# Altium PCB 222.PcbDoc
Units mil, origin at the board's own origin, x right, y up, seen from the top; angles counter-clockwise.
Board outline 1929.13 x 275.59 mil, 2 copper layers (Top Layer, Bottom Layer); 5 components, 5 nets, 22 pads, 0 vias.
Unrouted connection lines stored in the file: 17.
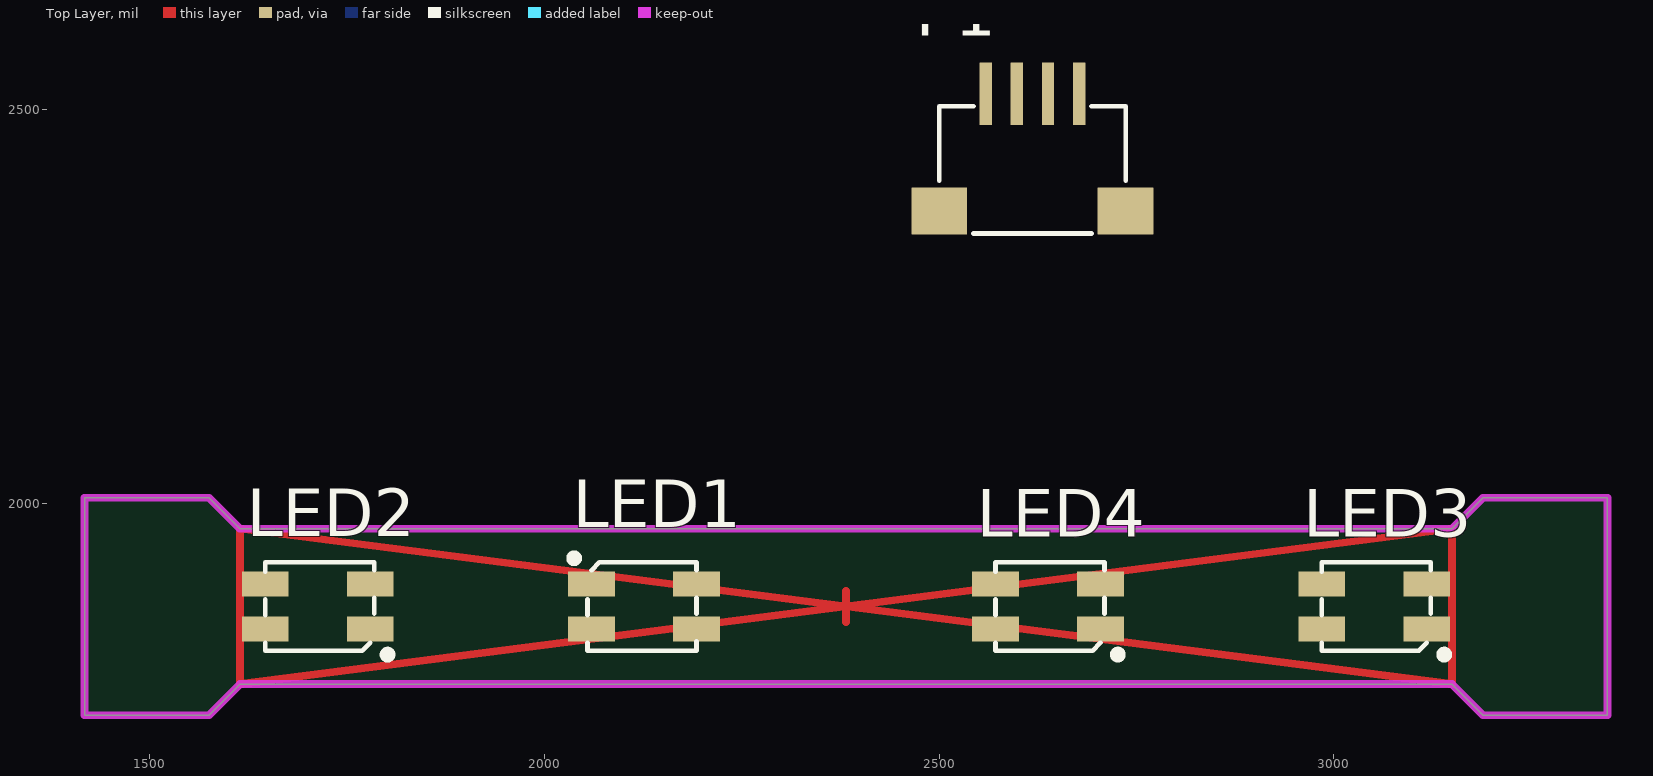
[diagram p0: Top Layer view]
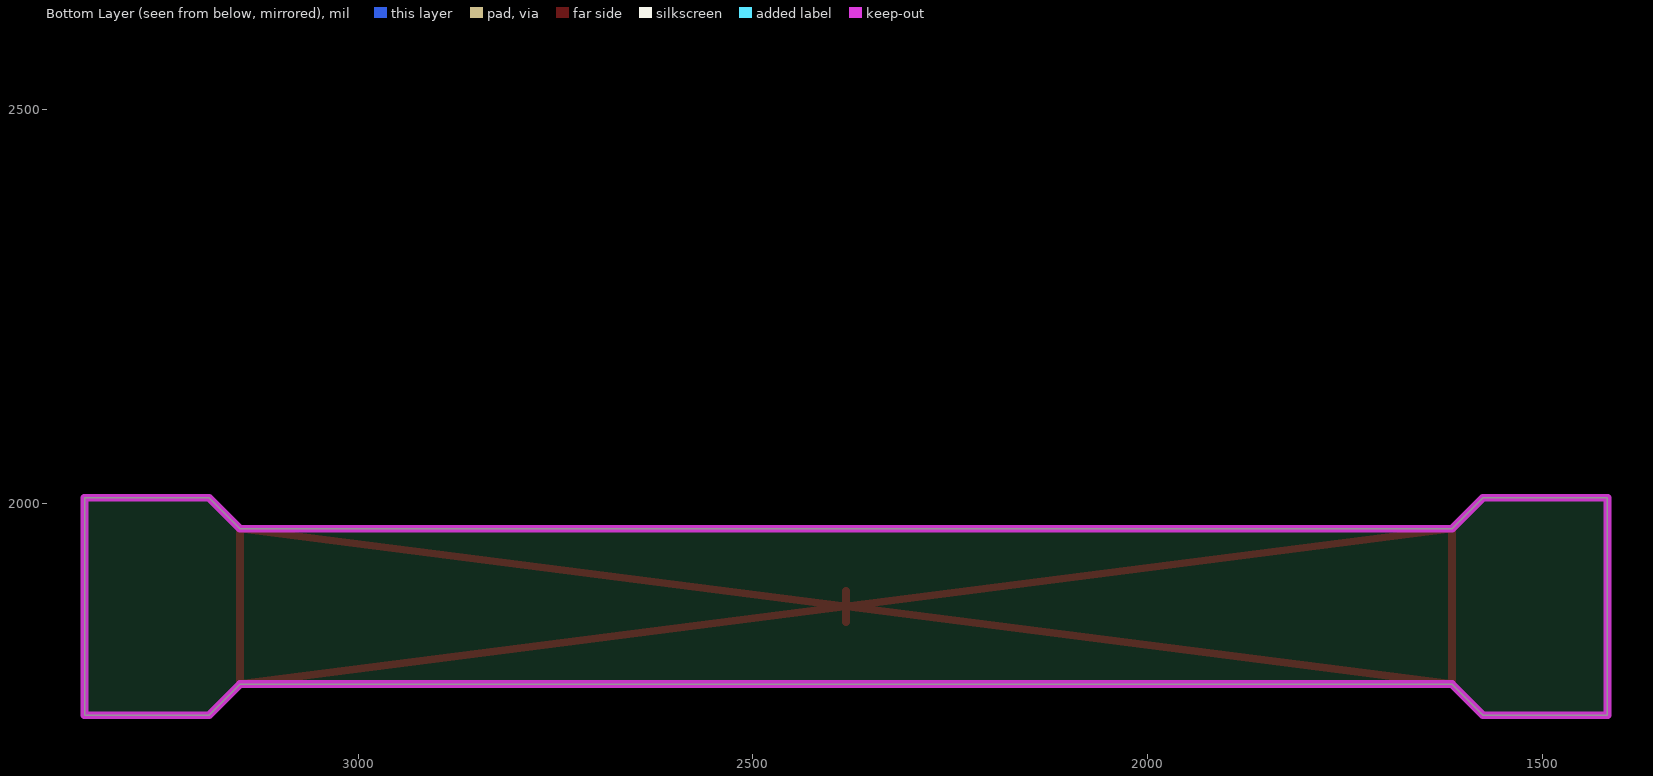
[diagram p1: Bottom Layer view, seen from below]

## Layer stack, top to bottom
Top Layer: signal copper 1.4
Dielectric: dielectric 12.6, FR-4, Dk 4.8
Bottom Layer: signal copper 1.4

## Board outline
1417.32,2007.87 1417.32,1732.28 1574.8,1732.28 1614.17,1771.65 3149.61,1771.65 3188.98,1732.28 3346.46,1732.28 3346.46,2007.87 3188.98,2007.87 3149.61,1968.5 1614.17,1968.5 1574.8,2007.87

## Design rules (kind name [scope] priority, off if disabled: settings)
Clearance [All] p1: gap=10
PolygonConnect [All] p1: connectstyle=Relief reliefconductorwidth=10 reliefentries=4 polygonreliefangle="90 Angle" airgapwidth=10
RoutingVias [All] p1: holewidth=28 width=50 viastyle="Through Hole" minholewidth=28 minwidth=50 maxholewidth=28 maxwidth=50
SolderMaskExpansion [All] p1: expansion=4
Width [All] p1: maxlimit=10 minlimit=10 preferedwidth=10
28 further rules are at their usual default settings.

## Components (designator, comment, footprint, x,y, rotation, side; value= is the part's Value field where it differs from the comment)
LED1 "RGB-3528" "LED 3528-4Pin" 2125.98,1870.08 r0 top
LED2 "RGB-3528" "LED 3528-4Pin" 1712.6,1870.08 r180 top
LED3 "RGB-3528" "LED 3528-4Pin" 3051.18,1870.08 r180 top
LED4 "RGB-3528" "LED 3528-4Pin" 2637.8,1870.08 r180 top
P1 "P" SH1.0_4pin 2559.06,2519.68 r0 top

## Footprints (in the part's own frame and the unit in brackets; to place one, negate y for a bottom-side part, rotate by r counter-clockwise, add the part's x,y. Pads: shape width x height; smd on the part's side, far side on the other; paste and mask are expansions set on the pad)
"LED 3528-4Pin" [mm] "4脚，3528LED"
  rect 1.5x0.8 smd: 1(-1.689,0.725) 2(-1.689,-0.725) 3(1.689,-0.725) 4(1.689,0.725)
  silkscreen extent -2.37,-1.42 1.69,1.68, body extent -1.75,-1.4 1.75,1.4, height 1.95
SH1.0_4pin [mm]
  rect 1.8x1.5 smd: 0(-1.5,-3.775) 0(4.5,-3.775)
  rect 0.4x2 smd: 1(0,0) 2(1,0) 3(2,0) 4(3,0)
  silkscreen extent -1.5,-4.5 4.5,-0.4

## Part data
LED1 LED2 LED3 LED4: library part LED-RGB-3528, "三基色LED"
P1: library part SH1.0-4

## Nets (pads, with @x,y where several pads share a name; then routed paths per layer and width w, separated by ;. In a path a pad name is that pad's centre, name@x,y a point inside that pad or via, vN(x,y) a via of type N, cw(c..) or ccw(c..) an arc to the next point about the centre after c; other vN are vias at no path point)
GND: P1.0
NetLED1_1: LED1.1 LED2.1 LED3.1 LED4.1 P1.2
NetLED1_2: LED1.2 LED2.2 LED3.2 LED4.2 P1.3
NetLED1_3: LED1.3 LED2.3 LED3.3 LED4.3 P1.4
NetLED1_4: LED1.4 LED2.4 LED3.4 LED4.4 P1.1
copper on no net: | length 3529.1
  Top Layer w10: 2381.89,1850.39 2381.89,1889.76 ; 1614.17,1771.65 1614.17,1968.5 3149.61,1771.65 3149.61,1968.5 1614.17,1771.65

## Keep-outs
Keep-Out Layer:
  the board outline again, w10